# Altium PCB STM32F429_18Bit_20_09.PcbDoc (part 1 of 3)
Units mm, origin at the board's own origin, x right, y up, seen from the top; angles counter-clockwise.
Board outline 101.05 x 79.2 mm, 2 copper layers (Top Layer, Bottom Layer); 115 components, 171 nets, 599 pads, 391 vias.
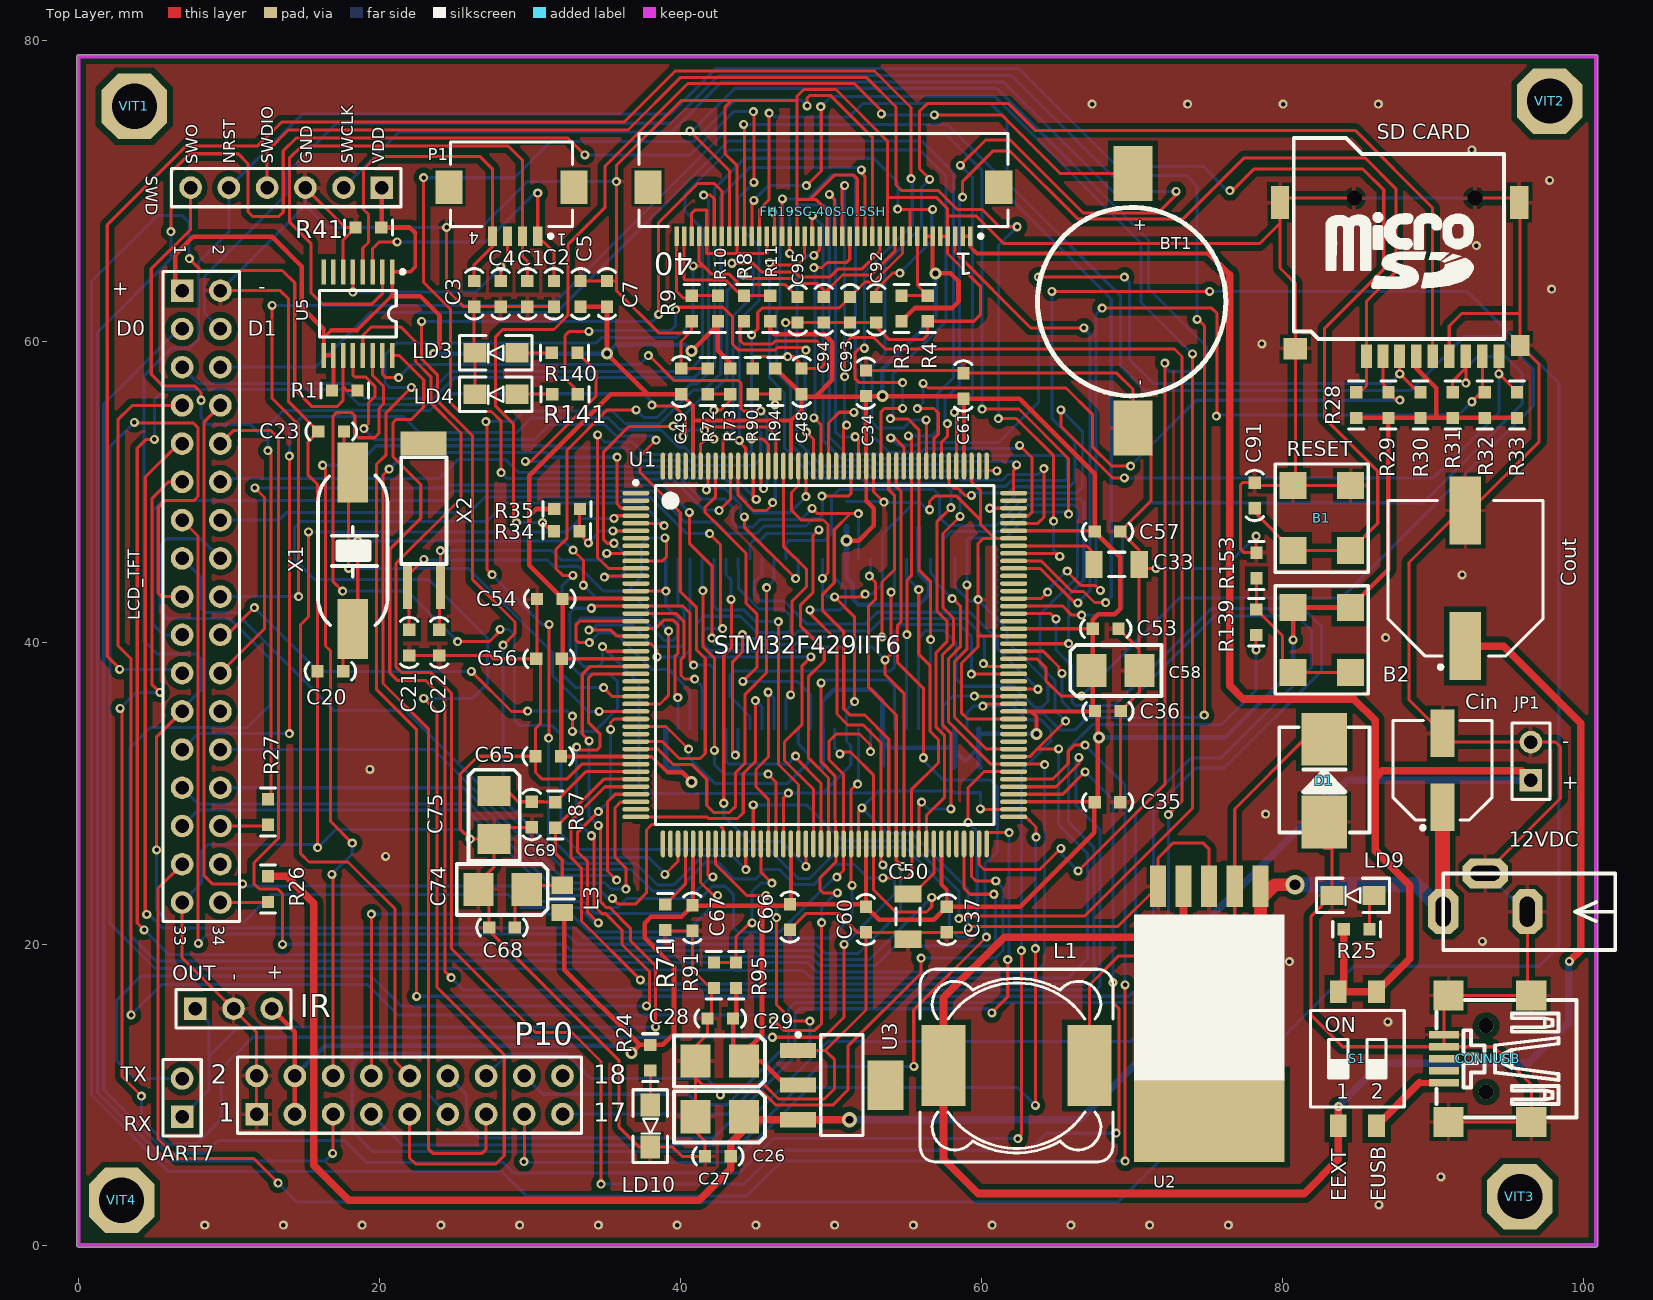
[diagram p0: Top Layer view]
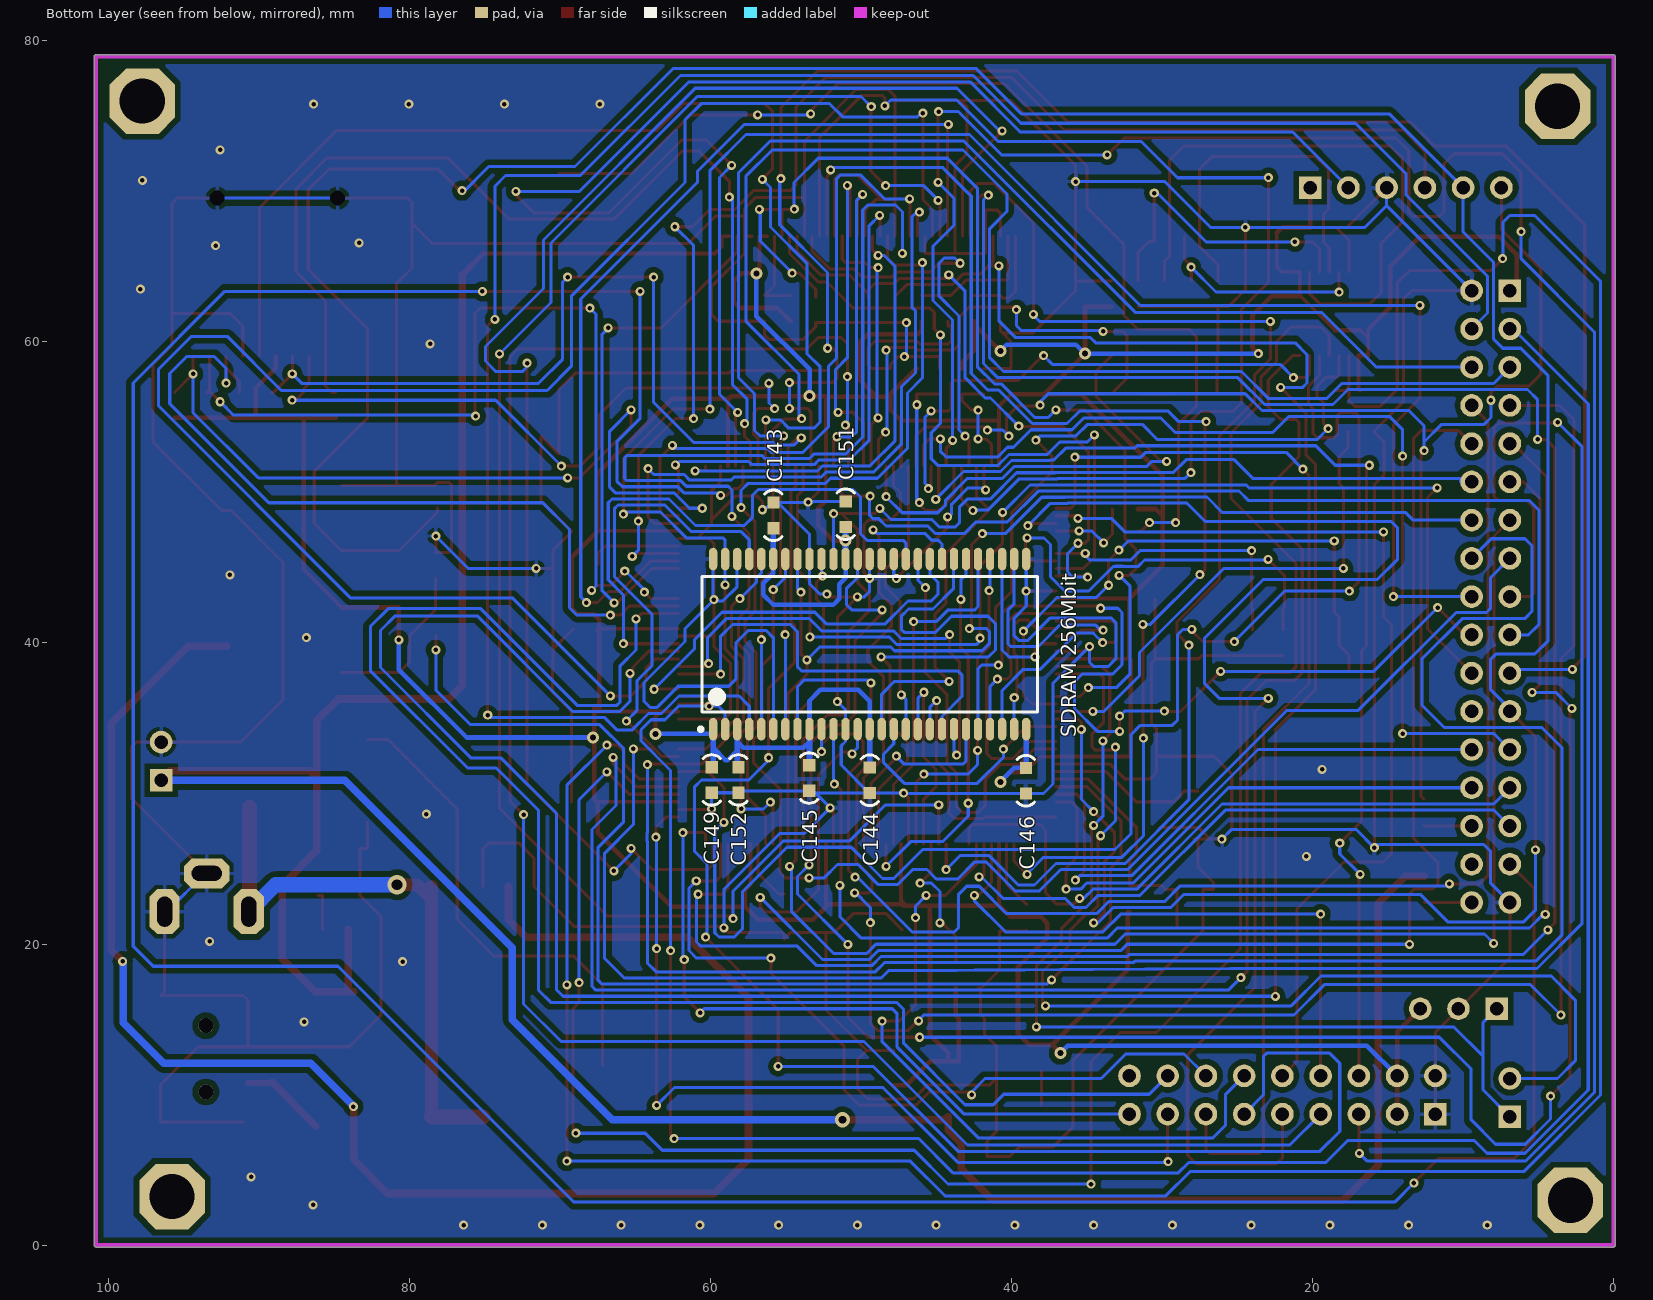
[diagram p1: Bottom Layer view, seen from below]

## Layer stack, top to bottom
Top Solder: solder mask 0.0102, Solder Resist, Dk 3.5
Top Layer: signal copper 0.0356
Dielectric1: dielectric 0.32, FR-4, Dk 4.8
Bottom Layer: signal copper 0.0356
Bottom Solder: solder mask 0.0102, Solder Resist, Dk 3.5

## Board outline
0,-0.127 cw(c0,0) -0.127,0 -0.127,78.95 cw(c0,78.95) 0,79.077 100.8,79.077 cw(c100.8,78.95) 100.927,78.95 100.927,0 cw(c100.8,0) 100.8,-0.127

## Design rules (kind name [scope] priority, off if disabled: settings)
Clearance Clearance_CAB [(InComponent('FH19SC-40S-0.5SH') OR InComponent('P1'))] p1: gap=0.2
Clearance Clearance_U [(InComponent('U1') OR InComponent('SDRAM 256Mbit'))] p2: gap=0.2
Clearance Clearance_Polygon [InPolygon] p3: gap=0.381
Clearance [All] p4: gap=0.203
Length [(InNetClass('Same Length'))] p1 off: maxlimit=40 minlimit=20
MatchedLengths [(InNetClass('Same Length'))] p1 off: tolerance=2.54 checknetsindiffpair=TRUE checkdiffpairvsdiffpair=TRUE checkothers=TRUE
MinimumSolderMaskSliver MinimumSolderMaskSliver_U16 [InComponent('U16')] p1 off: minsoldermaskwidth=0.254
MinimumSolderMaskSliver MinimumSolderMaskSliver_U7 [InComponent('U7')] p2 off: minsoldermaskwidth=0.254
MinimumSolderMaskSliver [All] p3 off: minsoldermaskwidth=0.254
PolygonConnect [All] p1: connectstyle=Relief reliefconductorwidth=0.254 reliefentries=4 polygonreliefangle="90 Angle" airgapwidth=0.254
RoutingPriority "RoutingPriority_Same Length" [(InNetClass('Same Length'))] p1: routingpriority=0
RoutingPriority [All] p2: routingpriority=1
RoutingVias RoutingVias_12V [InNet('+12VDC')] p1: holewidth=0.711 width=1.27 viastyle="Through Hole" minholewidth=0.711 minwidth=1.27 maxholewidth=0.711 maxwidth=1.27
RoutingVias RoutingVias_5V [InNet('+5V')] p2: holewidth=0.508 width=1.016 viastyle="Through Hole" minholewidth=0.508 minwidth=1.016 maxholewidth=2.54 maxwidth=7.62
RoutingVias RoutingVias_3V3 [InNet('+3V3')] p3: holewidth=0.4 width=0.8 viastyle="Through Hole" minholewidth=0.4 minwidth=0.8 maxholewidth=0.4 maxwidth=0.8
RoutingVias [All] p4: holewidth=0.3 width=0.6 viastyle="Through Hole" minholewidth=0.3 minwidth=0.6 maxholewidth=0.3 maxwidth=0.6
SMDNeckDown [All] p1: percent=80.000
SMDToCorner [All] p1: distance=0
SilkToSilkClearance [All] p1 off: silktosilkclearance=0.254
SilkToSolderMaskClearance SilkscreenOverComponentPads [IsPad] p1 off: minsilkscreentomaskgap=0.254 clearancetoexposedcopper=TRUE
SolderMaskExpansion [All] p1: expansion=0.102
UnConnectedPin [All] p1:
Width Width_12V [InNet('+12VDC')] p1: maxlimit=1.016 minlimit=1.016 preferedwidth=1.016
Width Width_5V [(InNet('E5V') OR InNet('5VUSB') OR InNet('+5V'))] p2: maxlimit=0.508 minlimit=0.508 preferedwidth=0.508
Width Width_3V3 [InNet('+3V3')] p3: maxlimit=0.305 minlimit=0.305 preferedwidth=0.305
Width Width_LCD_Module [(InNet('-7V') OR InNet('9V9') OR InNet('10V4') OR InNet('16V'))] p4: maxlimit=0.305 minlimit=0.305 preferedwidth=0.305
Width [All] p5: maxlimit=0.203 minlimit=0.203 preferedwidth=0.203
25 further rules are at their usual default settings.

## Classes and differential pairs
net class "Same Length": A0 A1 A2 A3 A4 A5 A6 A7 A8 A9 A10 A11 A12 D0 D1 D2 D3 D4 D5 D6 D7 D8 D9 D10 D11 D12 D13 D14 D15 PC0 PF11 PG4 PG5 PG8 PG15 PH3
net class LTDC_R[0..7]: LTDC_R2 LTDC_R3 LTDC_R4 LTDC_R5 LTDC_R6 LTDC_R7
net class "LCD Class": B0 B1 B2 B3 B4 B5 DCLK DE G0 G1 G2 G3 G4 G5 HS LTDC_R2 LTDC_R3 LTDC_R4 LTDC_R5 LTDC_R6 LTDC_R7 LTDC_VSYNC
net class G[0..7]: G0 G1 G2 G3 G4 G5
net class DCMI_D[0..7]: DCMI_D0 DCMI_D1 DCMI_D2 DCMI_D3 DCMI_D4 DCMI_D5 DCMI_D6 DCMI_D7
net class D[0..15]: D0 D1 D2 D3 D4 D5 D6 D7 D8 D9 D10 D11 D12 D13 D14 D15
net class "Camera Class": DCMI_D0 DCMI_D1 DCMI_D2 DCMI_D3 DCMI_D4 DCMI_D5 DCMI_D6 DCMI_D7 PA4 PA6 PB6 PB7 PG9
net class B[0..7]: B0 B1 B2 B3 B4 B5
net class A[0..12]: A0 A1 A2 A3 A4 A5 A6 A7 A8 A9 A10 A11 A12
component class U_SWD: R41 SWD
component class U_STM32Fx: B1 BT1 C20 C21 C22 C23 C33 C34 C35 C36 C37 C48 C49 C50 C53 C54 C56 C57 C58 C60 C61 C65 C66 C67 C68 C69 C74 C75 C91 L3 R34 R35 R71 R72 R73 R87 R90 R91 R94 R95 U1 X1 X2
component class U_Power: 12VDC C26 C27 C28 C29 Cin CONNUSB Cout D1 JP1 L1 LD9 LD10 R24 R25 S1 U2 U3
component class U_MicroSDCard: R28 R29 R30 R31 R32 R33 "SD CARD"
component class U_Memory: C143 C144 C145 C146 C149 C151 C152 "SDRAM 256Mbit"
component class U_LCD: LCD_TFT R26 R27
component class "U_LCD Module": C1 C2 C3 C4 C5 C7 C92 C93 C94 C95 FH19SC-40S-0.5SH P1 R1 R3 R4 R8 R9 R10 R11 U5
component class "U_IO Peripherals": B2 IR LD3 LD4 R139 R140 R141 R153 UART7 VIT1 VIT2 VIT3 VIT4
component class U_Camera: P10

## Components (designator, comment, footprint, x,y, rotation, side; value= is the part's Value field where it differs from the comment)
12VDC "DC-10B" "DC IN" 90.65,22.15 r90 top (schematic designator CN18)
B1 "TD-0341 [RESET/Black]" PB 82.581,48.294 r0 top
B2 "WKUP" PB 82.581,40.199 r0 top
BT1 "PIN" PCBComponent_1 69.95,62.575 r90 top
C1 "0.1uF" 0603_C 29.805,63.191 r270 top
C2 "0.1uF" 0603_C 31.57,63.191 r270 top
C3 "0.1uF" 0603_C 26.275,63.191 r270 top
C4 "0.1uF" 0603_C 28.04,63.191 r270 top
C5 "10uF" 0603_C 33.335,63.191 r90 top
C7 "0.1uF" 0603_C 35.101,63.191 r90 top
C20 "20pF" 0603_C 16.725,38.125 r180 top
C21 "10pF" 0603_C 21.959,40.026 r270 top
C22 "10pF" 0603_C 23.959,40.026 r270 top
C23 "20pF" 0603_C 16.775,54.05 r180 top
C26 "10uF/16V" AVX-CAPC3528_V 42.591,8.524 r180 top
C27 "0.1uF" 0603_C 42.466,5.899 r180 top
C28 "10uF/16V" AVX-CAPC3528_V 42.591,12.224 r180 top
C29 "0.1uF" 0603_C 42.625,15.05 r180 top
C33 "2.2uF" CAPC3216X100N 68.95,45.225 r0 top
C34 "100nF" 0603_C 52.3,57.25 r90 top
C35 "100nF" 0603_C 68.35,29.425 r0 top
C36 "100nF" 0603_C 68.375,35.475 r0 top
C37 "100nF" 0603_C 57.675,21.625 r270 top
C48 "100nF" 0603_C 48.025,57.375 r90 top
C49 "100nF" 0603_C 40.025,57.375 r90 top
C50 "2.2uF" CAPC3216X100N 55.1,21.825 r270 top
C53 "100nF" 0603_C 68.225,40.95 r0 top
C54 "100nF" 0603_C 31.3,42.925 r180 top
C56 "100nF" 0603_C 31.25,38.95 r180 top
C57 "100nF" 0603_C 68.35,47.4 r0 top
C58 "4.7uF" AVX-CAPC3528_V 68.875,38.175 r0 top
C60 "100nF" 0603_C 52.3,21.625 r270 top
C61 "100nF" 0603_C 58.775,57.075 r90 top
C65 "100nF" 0603_C 31.2,32.475 r180 top
C66 "100nF" 0603_C 47.25,21.8 r270 top
C67 "100nF" 0603_C 40.775,21.725 r270 top
C68 "100nF" 0603_C 28.125,21.1 r180 top
C69 "100nF" 0603_C 30.1,28.6 r270 top
C74 "1uF" AVX-CAPC3528_V 28.166,23.624 r180 top
C75 "1uF" AVX-CAPC3528_V 27.6,28.575 r270 top
C91 "100nF" 0603_C 78.125,49.8 r270 top
C92 "3.3pF" 0603_C 52.986,62.132 r270 top
C93 "3.3pF" 0603_C 51.244,62.132 r270 top
C94 "3.3pF" 0603_C 49.502,62.132 r270 top
C95 "3.3pF" 0603_C 47.761,62.132 r270 top
C143 "100nF" 0603_C 55.8,48.475 r90 bottom
C144 "100nF" 0603_C 49.4,30.875 r270 bottom
C145 "100nF" 0603_C 53.425,31.025 r270 bottom
C146 "100nF" 0603_C 39.025,30.85 r270 bottom
C149 "100nF" 0603_C 59.9,30.9 r270 bottom
C151 "100nF" 0603_C 51,48.55 r90 bottom
C152 "100nF" 0603_C 58.125,30.9 r270 bottom
Cin "100uF/16V" CAPAE660X540N 90.6,31.55 r90 top
CONNUSB "Mini USB B" "USB MINI B RECEPTACLE" 93.6,12.375 r270 top
Cout "1000uF/16V" CAPAE1030X1020N 92.125,44.3 r90 top
D1 "MBRS340T3" DO-214AB 82.75,30.85 r90 top
FH19SC-40S-0.5SH "FH19SC-40S-0.5SH" FFC/SM0.5-2H40A 49.475,68.65 r180 top locked
IR "IR" HDR1X3 7.75,15.7 r0 top
JP1 "Nguon Ngoai" HDR1X2#1 96.475,30.875 r90 top
L1 "100uH" IND_BOURNS_PM127SH 62.3,11.925 r180 top
L3 "BEAD" INDC2012X105N 32.125,23 r270 top
LCD_TFT "Header 17X2" HDR2X17 6.875,63.4 r270 top locked
LD3 "Red" 0805_LED 29.109,56.526 r180 top
LD4 "Blue" 0805_LED 29.109,59.276 r180 top
LD9 "red" 0805_LED 86.05,23.225 r180 top
LD10 "Blue" 0805_LED 37.975,9.3 r270 top
P1 "CAB 4" FFC/SM1.0-2H4 28.75,68.65 r180 top
P10 "Header 9X2" HDR2X9 11.825,8.7 r0 top locked
R1 "10K" 0603_R 17.675,56.775 r0 top
R3 "0R, not fit" 0603_R 54.659,62.223 r270 top
R4 "10K" 0603_R 56.401,62.223 r90 top
R8 "10K/not fit" 0603_R 44.209,62.223 r270 top
R9 "10K" 0603_R 40.726,62.223 r270 top
R10 "10K/Not fit" 0603_R 42.467,62.223 r90 top
R11 "10K" 0603_R 45.951,62.223 r90 top
R24 "470" 0603_R 37.975,12.45 r90 top
R25 "1K" 0603_R 84.9,20.975 r180 top
R26 "0 not fit" 0603_R 12.575,23.65 r270 top
R27 "0 not fit" 0603_R 12.575,28.775 r270 top
R28 "47K" 0603_R 84.875,55.8 r90 top
R29 "47K" 0603_R 87.01,55.8 r90 top
R30 "47K" 0603_R 89.145,55.8 r90 top
R31 "47K" 0603_R 91.28,55.8 r90 top
R32 "47K" 0603_R 93.415,55.8 r90 top
R33 "47K" 0603_R 95.55,55.8 r270 top
R34 "0R" 0603_R 32.425,47.425 r0 top
R35 "0R not fit" 0603_R 32.45,48.9 r0 top
R41 "R0.4W" 0603_R 19.25,67.6 r0 top
R71 "10K" 0603_R 38.975,21.775 r270 top
R72 "0 ohm not fit" 0603_R 41.8,57.375 r90 top
R73 "0" 0603_R 43.284,57.375 r90 top
R87 "0" 0603_R 31.666,28.574 r270 top
R90 "510" 0603_R 44.775,57.375 r90 top
R91 "510 not fit" 0603_R 42.2,17.925 r270 top
R94 "10K not fit" 0603_R 46.275,57.375 r270 top
R95 "10K" 0603_R 43.675,17.925 r90 top
R139 "330" 0603_R 78.225,41.375 r270 top
R140 "680" 0603_R 32.284,59.276 r0 top
R141 "680" 0603_R 32.309,56.526 r0 top
R153 "220K" 0603_R 78.25,45.15 r90 top
S1 "SW DIP-2" SW_OMRON_A6S-2102-H 84.95,12.375 r90 top
"SD CARD" "SD_Card_TF" SD_Card_TF 85.55,59.05 r0 top
"SDRAM 256Mbit" "MT48LC16M16A2P-75 IT" TSOP2-54_N 49.404,39.925 r90 bottom locked
SWD "Header 6H" HDR1X6 20.141,70.249 r180 top
U1 "MC-ARM-STM32F4X9-SQ176" STM-LQFP176_N 49.566,39.199 r0 top locked
U2 "LM2576T-5.0" TO263-5 75.1,23.8 r180 top
U3 "LM1117-3.3V" SOT223-4N 50.7,10.625 r0 top
U5 "TSC2046IPW" PW016 18.55,61.875 r180 top
UART7 "Header 2" HDR1X2#2 6.875,8.525 r90 top locked
VIT1 "1" VIT 3.7,75.65 r0 top
VIT2 "1" VIT 97.725,76 r0 top
VIT3 "1" VIT 95.75,3.225 r0 top
VIT4 "1" VIT 2.85,2.975 r0 top
X1 "25MHz(with socket)" HC49/US-SMD 18.209,46.126 r270 top
X2 "32.768KHz" "Cylindrical crystal" 22.934,48.501 r90 top

## Footprints (in the part's own frame and the unit in brackets; to place one, negate y for a bottom-side part, rotate by r counter-clockwise, add the part's x,y. Pads: shape width x height; smd on the part's side, far side on the other; paste and mask are expansions set on the pad)
0603_C [mil]
  rect 32x32 smd paste+0: 1(-33.46,0) 2(33.46,0)
  silkscreen extent -66,-23 66,23
0603_R [mil]
  rect 32x32 smd paste+0: 1(-33.47,0) 2(33.46,0)
  silkscreen extent -63,-20 63,20
0805_LED [mil]
  rect 60x50 smd paste+0: 1(0,0) 2(109.9,0)
  silkscreen extent -40,-45 150,45
AVX-CAPC3528_V [mm] "SMT Capacitor, 2 Leads, Body 3.5x2.8mm"
  rect 2x2.2 smd paste+0: 1(-1.6,0) 2(1.6,0)
  silkscreen extent -3,-1.7 3.05,1.7, body extent -1.79,-1.54 1.8,1.54, height 1.9
CAPAE660X540N [mm] "Capacitor, Aluminium Electrolytric, 6.6mm L X 6.6mm W X 5.4mm H, IPC Medium Density"
  rect 3.15x1.6 smd paste+0: 1(-2.45,0) 2(2.45,0)
  silkscreen extent -3.95,-3.3 3.3,3.3, body extent -3.9,-3.4 3.9,3.4, height 5.7
CAPAE1030X1020N [mm] "Capacitor, Aluminium Electrolytric, 10.3mm L X 10.3mm W X 10.2mm H, IPC Medium Density"
  rect 4.5x2.1 smd paste+0: 1(-4.5,0) 2(4.5,0)
  silkscreen extent -6.02,-5.15 5.15,5.15, body extent -6,-5.25 6,5.25, height 10.2
CAPC3216X100N [mm] "Chip Capacitor, Body 3.2x1.6mm, IPC Medium Density"
  rect 1.15x1.8 smd paste+0: 1(-1.5,0) 2(1.5,0)
  silkscreen extent -0.55,-0.8 0.55,0.8, body extent -1.7,-0.9 1.7,0.9, height 0.94
"Cylindrical crystal" [mil]
  rect 118.1x23.6 smd paste+0: 1(-187.37,-43.27) 2(-187.37,43.28)
  rect 62x120 smd paste+0: 3(187.37,1.14)
  silkscreen extent -128,-59 151,59, body extent -191,-55 183,55, height 87
"DC IN" [mm] "Power Header 3mm"
  oct 3x2 hole 1 slot 2 at 0 deg paste+1: 1(0,0) 3(0,-5.588)
  oct 2x3 hole 1 slot 2 at 90 deg paste+1: 2(2.54,-2.794)
  silkscreen extent -2.54,-11.43 2.54,0
DO-214AB [mm] "SMC"
  rect 3.499x3 smd paste+0: 1(-2.747,0) 2(2.747,0)
  silkscreen extent -3.45,-3 3.55,3, body extent -3.92,-3 4.03,2.9, height 2.3
FFC/SM0.5-2H40A [mm] "Connector; FH12 Series; 40 Position; 0.5mm Spaced Top Contact"
  rect 0.3x1.3 smd: 1(-9.75,1.625) 2(-9.25,1.625) 3(-8.75,1.625) 4(-8.25,1.625) 5(-7.75,1.625) 6(-7.25,1.625) 7(-6.75,1.625) 8(-6.25,1.625) 9(-5.75,1.625) 10(-5.25,1.625) 11(-4.75,1.625) 12(-4.25,1.625) 13(-3.75,1.625) 14(-3.25,1.625) 15(-2.75,1.625) 16(-2.25,1.625) 17(-1.75,1.625) 18(-1.25,1.625) 19(-0.75,1.625) 20(-0.25,1.625) 21(0.25,1.625) 22(0.75,1.625) 23(1.25,1.625) 24(1.75,1.625) 25(2.25,1.625) 26(2.75,1.625) 27(3.25,1.625) 28(3.75,1.625) 29(4.25,1.625) 30(4.75,1.625) 31(5.25,1.625) 32(5.75,1.625) 33(6.25,1.625) 34(6.75,1.625) 35(7.25,1.625) 36(7.75,1.625) 37(8.25,1.625) 38(8.75,1.625) 39(9.25,1.625) 40(9.75,1.625)
  rect 1.8x2.2 smd: 41(-11.65,-1.625) 42(11.65,-1.625)
  silkscreen extent -12.25,-5.2 12.25,1.75
FFC/SM1.0-2H4 [mm] "Connector; FH12 Series; 4 Position; 1.0mm Spaced Bottom Eccentric Contact"
  rect 0.6x1.3 smd paste+0: 1(-1.75,1.625) 2(-0.75,1.625) 3(0.25,1.625) 4(1.25,1.625)
  rect 1.8x2.2 smd paste+0: 5(4.15,-1.625) 6(-4.15,-1.625)
  silkscreen extent -4.05,-4.62 4.05,1.75
HC49/US-SMD [mm] "HC-49/U SMD Low Profile XTAL"
  rect 4x2 smd paste+0: 1(-5.195,0) 2(5.195,0)
  silkscreen extent -4.99,-2.3 4.95,2.3, body extent -6.2,-2.3 6.1,2.2, height 5.18
HDR1X2#1 [mm] "Connector; Header; 2 Position"
  rect 1.5x1.5 hole 0.9 paste+0: 1(0,0)
  round 1.5 hole 0.9 paste+0: 2(2.54,0)
  silkscreen extent -1.27,-1.27 3.81,1.27
HDR1X2#2 [mm] "Connector; Header; 2 Position"
  rect 1.5x1.5 hole 0.9: 1(0,0)
  round 1.5 hole 0.9: 2(2.54,0)
  silkscreen extent -1.27,-1.27 3.81,1.27
HDR1X3 [mm] "Connector; Header; 3 Position"
  rect 1.5x1.5 hole 0.9: 1(0,0)
  round 1.5 hole 0.9: 2(2.54,0) 3(5.08,0)
  silkscreen extent -1.27,-1.27 6.35,1.27
HDR1X6 [mm] "Connector; Header; 6 Position"
  rect 1.5x1.5 hole 0.9 paste+0: 1(0,0)
  round 1.5 hole 0.9 paste+0: 2(2.54,0) 3(5.08,0) 4(7.62,0) 5(10.16,0) 6(12.7,0)
  silkscreen extent -1.27,-1.27 13.97,1.27, body extent -1.27,-1.27 13.97,1.27, height 7
HDR2X9 [mm] "Connector; Header; 9x2 Position"
  rect 1.5x1.5 hole 0.9: 1(0,0)
  round 1.5 hole 0.9: 2(0,2.54) 3(2.54,0) 4(2.54,2.54) 5(5.08,0) 6(5.08,2.54) 7(7.62,0) 8(7.62,2.54) 9(10.16,0) 10(10.16,2.54) 11(12.7,0) 12(12.7,2.54) 13(15.24,0) 14(15.24,2.54) 15(17.78,0) 16(17.78,2.54) 17(20.32,0) 18(20.32,2.54)
  silkscreen extent -1.27,-1.27 21.59,3.81
HDR2X17 [mm] "Connector; Header; 17x2 Position"
  rect 1.5x1.5 hole 0.9 paste+0: 1(0,0)
  round 1.5 hole 0.9 paste+0: 2(0,2.54) 3(2.54,0) 4(2.54,2.54) 5(5.08,0) 6(5.08,2.54) 7(7.62,0) 8(7.62,2.54) 9(10.16,0) 10(10.16,2.54) 11(12.7,0) 12(12.7,2.54) 13(15.24,0) 14(15.24,2.54) 15(17.78,0) 16(17.78,2.54) 17(20.32,0) 18(20.32,2.54) 19(22.86,0) 20(22.86,2.54) 21(25.4,0) 22(25.4,2.54) 23(27.94,0) 24(27.94,2.54) 25(30.48,0) 26(30.48,2.54) 27(33.02,0) 28(33.02,2.54) 29(35.56,0) 30(35.56,2.54) 31(38.1,0) 32(38.1,2.54) 33(40.64,0) 34(40.64,2.54)
  silkscreen extent -1.27,-1.27 41.91,3.81
IND_BOURNS_PM127SH [mm] "SMD Inductor  Body Width 12.5mm Body Lenght 12.5mm Height 8mm"
  rect 2.9x5.4 smd paste+0: 1(-4.85,0) 2(4.85,0)
  silkscreen extent -6.4,-6.4 6.4,6.4, body extent -6.4,-6.4 6.4,6.4, height 8
INDC2012X105N [mm] "Chip Inductor, EIA 0805, Metric 2012, Body 2.0x1.25mm, IPC Medium Density"
  rect 1.15x1.45 smd paste+0: 1(-0.9,0) 2(0.9,0)
  silkscreen extent 0,-0.8 0,0.8, body extent -1.1,-0.7 1.1,0.7, height 1.1
PB [mil]
  rect 70x70 smd paste+0: 1(-75,85) 2(-75,-85) 3(75,-85) 4(75,85)
  silkscreen extent -122,-141 122,142
PCBComponent_1 [mil]
  rect 144x102 smd paste+0: 1(338.58,-3.94) 2(-326.77,-3.94)
  Top Overlay keep-out circle w10: c3.94,0 r247.91
  silkscreen extent -244,-248 252,248
PW016 [mm] "Shrink Small Outline; 16 Leads; Body Width 4.4 mm; Pitch 0.65 mm"
  rect 0.3x1.65 smd paste+0: 1(-2.275,-2.775) 2(-1.625,-2.775) 3(-0.975,-2.775) 4(-0.325,-2.775) 5(0.325,-2.775) 6(0.975,-2.775) 7(1.625,-2.775) 8(2.275,-2.775) 9(2.275,2.775) 10(1.625,2.775) 11(0.975,2.775) 12(0.325,2.775) 13(-0.325,2.775) 14(-0.975,2.775) 15(-1.625,2.775) 16(-2.275,2.775)
  silkscreen extent -3.1,-2.9 2.55,1.55
SD_Card_TF [mil]
  rect 28x62 smd paste+0: 1(0,0) 2(43.31,0) 3(86.61,0) 4(129.92,0) 5(173.23,0) 6(216.54,0) 7(259.84,0) 8(303.15,0) 9(346.46,0)
  rect 48x86 smd paste+0: 6(-226,402) 6(400,402)
  rect 62x56 smd paste+0: 6(-186,20)
  round 30 hole 39.37 paste+0 mask+0: 6(-31.5,413.39) 6(283.47,413.39)
  rect 48x56 smd paste+0: 6(402,28)
  silkscreen extent -190,45 360,571, body extent -235,-27 407,572, height 79
SOT223-4N [mm] "SOT223, 4-Leads, Body 6.5x3.5mm, Pitch 2.3mm, Lead Span 7mm, IPC Medium Density"
  rect 2.4x1 smd paste+0: 1(-2.9,2.3) 2(-2.9,0) 3(-2.9,-2.3)
  rect 2.4x3.3 smd paste+0: 4(2.9,0)
  silkscreen extent -3.02,-3.35 1.4,3.47, body extent -3.39,-3.27 3.5,3.23, height 1.72
STM-LQFP176_N [mm] "Thin QFP, 176-Leads, Body 24x24mm, Pitch 0.5mm, IPC Medium Density"
  oval 1.8x0.3 smd paste+0: 1(-12.55,10.75) 2(-12.55,10.25) 3(-12.55,9.75) 4(-12.55,9.25) 5(-12.55,8.75) 6(-12.55,8.25) 7(-12.55,7.75) 8(-12.55,7.25) 9(-12.55,6.75) 10(-12.55,6.25) 11(-12.55,5.75) 12(-12.55,5.25) 13(-12.55,4.75) 14(-12.55,4.25) 15(-12.55,3.75) 16(-12.55,3.25) 17(-12.55,2.75) 18(-12.55,2.25) 19(-12.55,1.75) 20(-12.55,1.25) 21(-12.55,0.75) 22(-12.55,0.25) 23(-12.55,-0.25) 24(-12.55,-0.75) 25(-12.55,-1.25) 26(-12.55,-1.75) 27(-12.55,-2.25) 28(-12.55,-2.75) 29(-12.55,-3.25) 30(-12.55,-3.75) 31(-12.55,-4.25) 32(-12.55,-4.75) 33(-12.55,-5.25) 34(-12.55,-5.75) 35(-12.55,-6.25) 36(-12.55,-6.75) 37(-12.55,-7.25) 38(-12.55,-7.75) 39(-12.55,-8.25) 40(-12.55,-8.75) 41(-12.55,-9.25) 42(-12.55,-9.75) 43(-12.55,-10.25) 44(-12.55,-10.75) 89(12.55,-10.75) 90(12.55,-10.25) 91(12.55,-9.75) 92(12.55,-9.25) 93(12.55,-8.75) 94(12.55,-8.25) 95(12.55,-7.75) 96(12.55,-7.25) 97(12.55,-6.75) 98(12.55,-6.25) 99(12.55,-5.75) 100(12.55,-5.25) 101(12.55,-4.75) 102(12.55,-4.25) 103(12.55,-3.75) 104(12.55,-3.25) 105(12.55,-2.75) 106(12.55,-2.25) 107(12.55,-1.75) 108(12.55,-1.25) 109(12.55,-0.75) 110(12.55,-0.25) 111(12.55,0.25) 112(12.55,0.75) 113(12.55,1.25) 114(12.55,1.75) 115(12.55,2.25) 116(12.55,2.75) 117(12.55,3.25) 118(12.55,3.75) 119(12.55,4.25) 120(12.55,4.75) 121(12.55,5.25) 122(12.55,5.75) 123(12.55,6.25) 124(12.55,6.75) 125(12.55,7.25) 126(12.55,7.75) 127(12.55,8.25) 128(12.55,8.75) 129(12.55,9.25) 130(12.55,9.75) 131(12.55,10.25) 132(12.55,10.75)
  oval 0.3x1.8 smd paste+0: 45(-10.75,-12.55) 46(-10.25,-12.55) 47(-9.75,-12.55) 48(-9.25,-12.55) 49(-8.75,-12.55) 50(-8.25,-12.55) 51(-7.75,-12.55) 52(-7.25,-12.55) 53(-6.75,-12.55) 54(-6.25,-12.55) 55(-5.75,-12.55) 56(-5.25,-12.55) 57(-4.75,-12.55) 58(-4.25,-12.55) 59(-3.75,-12.55) 60(-3.25,-12.55) 61(-2.75,-12.55) 62(-2.25,-12.55) 63(-1.75,-12.55) 64(-1.25,-12.55) 65(-0.75,-12.55) 66(-0.25,-12.55) 67(0.25,-12.55) 68(0.75,-12.55) 69(1.25,-12.55) 70(1.75,-12.55) 71(2.25,-12.55) 72(2.75,-12.55) 73(3.25,-12.55) 74(3.75,-12.55) 75(4.25,-12.55) 76(4.75,-12.55) 77(5.25,-12.55) 78(5.75,-12.55) 79(6.25,-12.55) 80(6.75,-12.55) 81(7.25,-12.55) 82(7.75,-12.55) 83(8.25,-12.55) 84(8.75,-12.55) 85(9.25,-12.55) 86(9.75,-12.55) 87(10.25,-12.55) 88(10.75,-12.55) 133(10.75,12.55) 134(10.25,12.55) 135(9.75,12.55) 136(9.25,12.55) 137(8.75,12.55) 138(8.25,12.55) 139(7.75,12.55) 140(7.25,12.55) 141(6.75,12.55) 142(6.25,12.55) 143(5.75,12.55) 144(5.25,12.55) 145(4.75,12.55) 146(4.25,12.55) 147(3.75,12.55) 148(3.25,12.55) 149(2.75,12.55) 150(2.25,12.55) 151(1.75,12.55) 152(1.25,12.55) 153(0.75,12.55) 154(0.25,12.55) 155(-0.25,12.55) 156(-0.75,12.55) 157(-1.25,12.55) 158(-1.75,12.55) 159(-2.25,12.55) 160(-2.75,12.55) 161(-3.25,12.55) 162(-3.75,12.55) 163(-4.25,12.55) 164(-4.75,12.55) 165(-5.25,12.55) 166(-5.75,12.55) 167(-6.25,12.55) 168(-6.75,12.55) 169(-7.25,12.55) 170(-7.75,12.55) 171(-8.25,12.55) 172(-8.75,12.55) 173(-9.25,12.55) 174(-9.75,12.55) 175(-10.25,12.55) 176(-10.75,12.55)
  silkscreen extent -12.67,-11.25 11.25,11.57, body extent -12,-12 12,12, height 1.6
SW_OMRON_A6S-2102-H [mm] "Pitch 2.54mm, Body 6.2x6.4mm, 2 Ways SPST Surface-Mounting DIP Switch, OMRON A6S-H"
  rect 1.5x1.1 smd paste+0: 1(-4.45,1.27) 2(-4.45,-1.27) 3(4.45,-1.27) 4(4.45,1.27)
  silkscreen extent -3.2,-3.11 3.2,3.11, body extent -4.9,-3.01 4.9,3.01, height 3.97
TO263-5 [mm] "LM2576-SMD"
  rect 1.07x2.75 smd paste+0: 1(-3.4,-0.025) 2(-1.7,-0.025) 3(0,-0.025) 4(1.7,-0.025) 5(3.4,-0.025)
  rect 10x6 smd paste+0: 1(0,15.289)
  silkscreen extent -5,1.85 5,12.88, body extent -5,-0.38 5,15.29, height 4.79
TSOP2-54_N [mm] "SOP, 54-Leads, Body 22.2x10.16mm, Pitch 0.8mm, IPC Medium Density"
  oval 1.5x0.55 smd paste+0: 1(-5.65,10.4) 2(-5.65,9.6) 3(-5.65,8.8) 4(-5.65,8) 5(-5.65,7.2) 6(-5.65,6.4) 7(-5.65,5.6) 8(-5.65,4.8) 9(-5.65,4) 10(-5.65,3.2) 11(-5.65,2.4) 12(-5.65,1.6) 13(-5.65,0.8) 14(-5.65,0) 15(-5.65,-0.8) 16(-5.65,-1.6) 17(-5.65,-2.4) 18(-5.65,-3.2) 19(-5.65,-4) 20(-5.65,-4.8) 21(-5.65,-5.6) 22(-5.65,-6.4) 23(-5.65,-7.2) 24(-5.65,-8) 25(-5.65,-8.8) 26(-5.65,-9.6) 27(-5.65,-10.4) 28(5.65,-10.4) 29(5.65,-9.6) 30(5.65,-8.8) 31(5.65,-8) 32(5.65,-7.2) 33(5.65,-6.4) 34(5.65,-5.6) 35(5.65,-4.8) 36(5.65,-4) 37(5.65,-3.2) 38(5.65,-2.4) 39(5.65,-1.6) 40(5.65,-0.8) 41(5.65,0) 42(5.65,0.8) 43(5.65,1.6) 44(5.65,2.4) 45(5.65,3.2) 46(5.65,4) 47(5.65,4.8) 48(5.65,5.6) 49(5.65,6.4) 50(5.65,7.2) 51(5.65,8) 52(5.65,8.8) 53(5.65,9.6) 54(5.65,10.4)
  silkscreen extent -5.77,-11.15 4.5,11.35, body extent -5.12,-11.15 5.12,11.15, height 1.2
"USB MINI B RECEPTACLE" [mm]
  rect 0.5x2 smd paste+0: 1(1.6,-2.901) 2(0.8,-2.901) 3(0,-2.901) 4(-0.8,-2.901) 5(-1.6,-2.901)
  rect 2x2 smd paste+0: SHIELD(-4.2,2.9) SHIELD(-4.2,-2.6) SHIELD(4.201,2.9) SHIELD(4.201,-2.6)
  round 1 / inner round 1.524 / far side round 1 hole 1 unplated paste+0: ""(-2.2,-0.1) ""(2.2,-0.1)
  silkscreen extent -3.9,-3.4 3.9,5.9, body extent -5.3,-3.3 5.4,5.9, height 3.95
VIT [mm] "VIT"
  oct 4.35x4.35 hole 3 paste+0 mask-1.5: VIT1(0,0)

## Part data
12VDC: library part PJ202A
B1 B2: library part "SW PUSHBUTTON", "SE PUSHBUTTON"
BT1: library part Battery3.3V, "Multicell Battery"
C1 C2 C3 C4 C5 C7 C92 C93 C94 C95: library part GRM188R71A225KE15, "Murata General Purpose Ceramic Cap 0603 2.2uF 10V 10% X7R"
C20 C21 C22 C23 C91: library part CAP, "Capacitor"
C26 C28 Cin Cout: library part AVX-CAP-P-2
C27 C29 C33 C34 C35 C36 C37 C48 C49 C50 C53 C54 C56 C57 C60 C61 C65 C66 C67 C68 C69 C143 C144 C145 C146 C149 C151 C152: library part Cap, "Capacitor"
C58 C74 C75: library part "Cap Pol1", "Polarized Capacitor (Radial)"
CONNUSB: library part 10033526-N3212LF, "FCI Mini USB B Recptacle Right Angle"
D1: library part D1A, "Diode 1A"
IR: library part "Header 3", "Header, 3-Pin"
JP1: library part "Header 2", "Header, 2-Pin"
L1: library part L1, "Inductor"
L3: library part Inductor, "Inductor"
LCD_TFT: "Header, 17-Pin, Dual row"
LD3 LD4 LD9 LD10: library part LED2, "Typical RED, GREEN, YELLOW, AMBER GaAs LED"
P1: library part "Header 4", "Header, 4-Pin"
P10: "Header, 9-Pin, Dual row"
R1 R3 R4 R8 R9 R10 R11: library part RC0603JR-0710RL, "Yageo RES 10R 5% 1/10W 0603"
R24 R25 R34 R35 R90 R91 R94 R95 R153: library part res1, "Resistor"
R26 R27 R28 R29 R30 R31 R32 R33 R71 R72 R73 R87 R139 R140 R141: library part Res1, "Resistor"
R41: library part "Res 1/4 W", "Resistor"
S1: "DIP Switch, 2 Position, SPST"
"SD CARD": "SD"
"SDRAM 256Mbit": "256Mb Synchronous High-Speed CMOS DRAM, 16Mb x 16Bit x 4 Banks, 54-Pin TSOP Pb-free, Industrial"
SWD: "Header, 6-Pin, Right Angle"
U2: "SIMPLE SWITCHER; 3A Step-Down Voltage Regulator"
U3: library part LM1117, "800mA Low-Dropout Linear Regulator"
U5: "4-Wire Touch Screen controller with Low-Voltage I/O Interface, 16-Pin TSSOP, Pb-Free"
UART7: "Header, 2-Pin"
VIT1 VIT2 VIT3 VIT4: library part VIT, "Oc Vit"
X1: library part CRYSTAL, "Crystal"
X2: library part XTAL/32KHz, "Crystal Oscillator"

## Via types
v1: diameter 0.6, hole 0.3, Top Layer to Bottom Layer, 380 vias
v2: diameter 0.8, hole 0.4, Top Layer to Bottom Layer, 9 vias
v3: diameter 1.016, hole 0.508, Top Layer to Bottom Layer, 1 vias
v4: diameter 1.27, hole 0.711, Top Layer to Bottom Layer, 1 vias

## Nets (pads, with @x,y where several pads share a name; then routed paths per layer and width w, separated by ;. In a path a pad name is that pad's centre, name@x,y a point inside that pad or via, vN(x,y) a via of type N, cw(c..) or ccw(c..) an arc to the next point about the centre after c; other vN are vias at no path point)
5VUSB: CONNUSB.1 S1.2 | length 5.7
  Top Layer w0.4: 89.07,10.775 CONNUSB.1@90.699,10.775
  Top Layer w0.508: S1.2@86.22,7.925 89.07,10.775
+3V3: "SD CARD.4" "SDRAM 256Mbit.1" "SDRAM 256Mbit.3" "SDRAM 256Mbit.9" "SDRAM 256Mbit.14" "SDRAM 256Mbit.27" "SDRAM 256Mbit.43" "SDRAM 256Mbit.49" B2.1 B2.4 C5.1 C7.1 C28.1 C29.1 C34.1 C35.1 C36.1 C37.1 C48.1 C49.1 C53.1 C54.1 C56.1 C57.1 C58.1 C60.1 C61.1 C65.1 C66.1 C67.1 C143.1 C144.1 C145.1 C146.1 C149.1 C151.1 C152.1 FH19SC-40S-0.5SH.6 FH19SC-40S-0.5SH.7 IR.3 L3.2 LCD_TFT.1 P10.3 P10.4 R1.1 R3.2 R10.1 R11.1 R24.2 R28.1 R29.1 R30.1 R31.1 R32.1 R33.2 R35.1 R41.2 R73.2 R94.1 R95.1 SWD.1 U1.15 U1.23 U1.36 U1.49 U1.62 U1.72 U1.82 U1.91 U1.103 U1.114 U1.127 U1.136 U1.149 U1.159 U1.172 U3.2 U5.1 U5.9 U5.10 | length 509
  Top Layer w0.24: U5.9@16.275,59.1 16.275,60.264 ; 16.275,60.833 16.275,60.264 ; 16.777,60.765 16.275,60.264 ; 18.49,60.765 20.765,63.04 ; 20.825,63.108 U5.1@20.825,64.65 22.025,64.65 22.35,64.975 22.35,67.25 ; U1.36@37.016,32.449 38.079,32.449 39.129,31.4 ; 52.316,49.459 U1.149@52.316,51.749 ; FH19SC-40S-0.5SH.7@56.225,67.025 56.225,67.02 FH19SC-40S-0.5SH.6@56.725,67.02 ; v2@56.725,64.757 FH19SC-40S-0.5SH.6@56.725,67.02 ; FH19SC-40S-0.5SH.6@56.725,67.025 FH19SC-40S-0.5SH.6@56.725,67.02 ; U1.103@62.116,35.449 63.276,35.449 63.632,35.094 v2(63.632,33.965)
  Top Layer w0.254: R1.1@16.825,56.775 16.925,56.875 U5.10@16.925,59.1 ; C65.1@32.05,32.475 32.076,32.449 U1.36@37.016,32.449 ; C56.1@32.15,38.949 U1.23@37.016,38.949 ; C54.1@32.15,42.925 32.174,42.949 U1.15@37.016,42.949 ; C49.1@40.025,56.525 40.816,55.734 40.816,54.8 ; C67.1@40.816,22.616 U1.49@40.816,26.649 ; U1.172@40.816,51.749 40.816,54.8 ; C66.1@46.991,22.575 47.316,22.9 U1.62@47.316,26.649 ; U1.159@47.316,51.749 47.316,54.775 ; C48.1@48.2,56.35 C48.1@48.025,56.525 48.025,55.484 47.316,54.775 ; C60.1@52.125,22.65 C60.1@52.3,22.475 52.316,22.49 U1.72@52.316,26.649 ; C34.1@52.3,56.35 52.3,51.765 U1.149@52.316,51.749 ; U1.82@57.316,26.649 57.316,23.959 57.675,23.6 C37.1@57.675,22.475 ; C61.1@58.775,56.225 58.816,56.184 U1.136@58.816,51.749 ; U1.91@62.116,29.449 C35.1@67.476,29.449 ; U1.103@62.116,35.449 67.499,35.449 C36.1@67.7,35.65 ; U1.114@62.116,40.949 C53.1@67.375,40.95 ; U1.127@62.116,47.449 67.451,47.449 C57.1@67.5,47.4 ; C53.1@67.375,40.95 C53.1@67.5,40.825 ; 40.816,54.8 40.841,54.775 47.316,54.775
  Top Layer w0.305: LCD_TFT.1@6.875,63.4 6.425,63.4 6.425,65.8 7.6,66.975 12.85,66.975 14.813,65.012 14.813,62.296 16.275,60.833 ; IR.3@12.83,15.7 14.365,14.165 P10.4@14.365,11.24 P10.3@14.365,8.7 ; U5.9@16.275,59.1 U5.10@16.925,59.1 ; 16.777,60.765 18.49,60.765 ; SWD.1@20.141,70.249 20.141,67.641 R41.2@20.1,67.6 22,67.6 22.35,67.25 ; 20.765,63.04 22.71,63.04 23.975,61.775 23.975,59.621 v1(23.576,59.222) ; 29.999,48.501 30.397,48.9 R35.1@31.6,48.9 ; C65.1@32.05,32.475 32.05,38.849 32.15,38.949 C54.1@32.15,42.925 29.925,45.15 29.925,51.1 35.35,56.525 C49.1@40.025,56.525 37.798,56.525 v2(35.1,59.222) C7.1@35.1,62.341 34.193,62.341 ; L3.2@32.125,22.1 32.263,22.1 32.263,18.303 37.266,13.299 37.28,13.299 ; C5.1@33.335,62.341 34.193,62.341 ; v2(36.733,12.752) 37.28,13.299 ; 39.129,31.4 40.1,31.4 v2(40.725,30.775) ; v2(40.721,59.393) 42.467,61.14 R10.1@42.467,61.373 42.467,59.433 43.284,58.616 R73.2@43.284,58.225 ; C67.1@40.825,22.625 40.816,22.616 C67.1@40.775,22.575 40.822,22.575 40.047,21.8 38.025,21.8 37.6,21.375 37.6,20.425 39.552,18.473 39.552,14.052 38.8,13.3 38.512,13.3 ; C67.1@41.1,22.55 47.15,22.55 C66.1@47.25,22.65 C60.1@52.125,22.65 ; R95.1@43.675,17.075 43.675,15.25 C29.1@43.475,15.05 43.475,12.224 C28.1@44.191,12.224 ; 45.394,13.969 45.394,21.854 ; 45.4,22.55 45.4,13.975 44.191,12.766 C28.1@44.191,12.224 ; R11.1@45.951,61.373 45.951,60.774 46.207,60.518 49.53,60.518 50.075,59.972 50.075,57.475 48.95,56.35 48.2,56.35 C34.1@52.3,56.35 ; R94.1@46.275,58.225 46.325,58.225 C48.1@48.025,56.525 ; U3.2@47.8,10.625 46.975,10.625 45.376,12.224 C28.1@44.191,12.224 ; v2(51,46.802) 51.827,46.802 52.825,47.8 52.825,48.95 52.316,49.459 ; C60.1@52.3,22.475 53.175,21.6 56.8,21.6 C37.1@57.675,22.475 62.55,22.475 67.476,27.401 C35.1@67.476,29.449 ; v2(53.395,56.4) C34.1@52.3,56.4 58.6,56.4 C61.1@58.775,56.225 62.525,56.225 67.5,51.25 C57.1@67.5,47.4 69.2,45.7 69.2,42.275 68.825,41.9 67.725,41.9 67.375,41.55 C53.1@67.375,40.95 67.375,35.625 C36.1@67.525,35.475 ; R3.2@54.659,61.373 55.536,62.25 58.025,62.25 58.45,62.675 58.45,64.025 57.919,64.556 v2(56.926,64.556) ; C35.1@67.5,29.425 67.7,29.625 C36.1@67.7,35.65 ; v1(80.675,40.198) B2.1@80.676,42.358 B2.4@84.486,42.358 87.01,44.883 R29.1@87.01,54.95 ; R28.1@84.875,54.95 R29.1@87.01,54.95 ; 88.85,59.05 88.85,58.261 90.175,56.936 90.175,54.95 ; R33.2@95.55,54.95 94.467,54.95 R32.1@93.415,54.95 R31.1@91.28,54.95 R30.1@89.145,54.95 R29.1@87.01,54.95 ; 37.28,13.299 38.511,13.299 38.512,13.3 ; 37.28,13.299 37.281,13.3 R24.2@37.975,13.3 38.512,13.3
  Bottom Layer w0.305: P10.4@14.365,11.24 16.375,13.25 36.235,13.25 v2(36.733,12.752) ; v1(23.576,59.222) v2(35.1,59.222) 35.702,59.824 40.29,59.824 v2(40.721,59.393) ; C146.1@39.025,31.7 39.8,31.7 v2(40.725,30.775) ; 49.404,34.275 49.404,36.129 50.171,36.896 52.679,36.896 53.404,36.171 53.404,34.275 53.404,33.441 53.81,33.035 57.797,33.035 58.204,33.441 ; v2(51,46.802) C151.1@51,47.7 ; 51.004,45.575 51.004,44.321 51.425,43.9 51.425,42.925 51.825,42.525 55.794,42.525 56.464,43.195 56.464,43.961 55.804,44.621 55.804,45.575 ; v2(53.395,56.4) 53.395,58.17 56.926,61.701 v2(56.926,64.556) ; 58.204,34.275 58.204,33.441 ; 59.804,34.275 59.804,33.965 ; v2(63.632,33.965) 59.804,33.965 ; v2(67.781,33.721) 76.171,33.721 80.675,38.225 v1(80.675,40.198) ; 58.204,33.441 58.204,32.849 58.831,32.222 58.991,32.222 59.804,33.035 59.804,33.965
  Bottom Layer w0.381: 39.004,34.275 39.004,31.721 C146.1@39.025,31.7 ; C144.1@49.4,31.725 49.404,31.729 49.404,34.275 ; C151.1@51,47.7 51.004,47.696 51.004,45.575 ; 53.404,34.275 53.404,31.896 C145.1@53.425,31.875 ; C143.1@55.8,47.625 55.804,47.621 55.804,45.575 ; C152.1@58.125,31.75 58.204,31.829 58.204,34.275 ; 59.804,34.275 59.804,31.846 C149.1@59.9,31.75
+5V: C26.1 C27.1 FH19SC-40S-0.5SH.1 FH19SC-40S-0.5SH.2 JP1.1 R25.2 R26.1 S1.3 S1.4 U3.3 | length 215.6
  Top Layer w0.24: FH19SC-40S-0.5SH.2@58.725,67.025 58.725,67.02 FH19SC-40S-0.5SH.1@59.225,67.02 ; FH19SC-40S-0.5SH.1@59.225,67.025 FH19SC-40S-0.5SH.1@59.225,67.02 ; 75.059,65.875 59.675,65.875 59.225,66.325 FH19SC-40S-0.5SH.1@59.225,67.02
  Top Layer w0.381: 75.059,65.875 76.475,64.459
  Top Layer w0.508: R26.1@12.575,24.5 13.825,24.5 15.626,22.699 15.626,5.299 17.95,2.975 41.225,2.975 43.316,5.066 C27.1@43.316,5.899 43.316,6.771 44.191,7.646 C26.1@44.191,8.524 44.39,8.325 U3.3@47.8,8.325 v3(51.211,8.325) ; 76.475,64.459 76.475,37.175 77.375,36.275 84.714,36.275 86.125,34.864 86.125,31.025 ; 84.05,19.3 R25.2@84.05,20.975 84.05,16.825 S1.4@83.68,16.825 S1.3@86.22,16.825 88.425,19.03 88.425,23.911 86.125,26.211 86.125,31.025 ; JP1.1@96.475,30.875 95.85,31.5 86.6,31.5 86.125,31.025
  Bottom Layer w0.508: v3(51.211,8.325) 66.5,8.325 73.157,14.982 73.157,19.757 84.275,30.875 JP1.1@96.475,30.875
+12VDC: 12VDC.1 Cin.1 U2.1 | length 39
  Top Layer w0.856: U2.1@78.5,23.825 U2.1@78.5,22.976 ; U2.1@78.516,8.511 78.516,22.976 U2.1@78.5,22.976 ; v4(80.801,23.942) 79.465,23.942 U2.1@78.5,22.976
  Top Layer w1.016: U2.1@75.1,8.511 U2.1@78.516,8.511 ; Cin.1@90.6,29.1 90.6,22.2 12VDC.1@90.65,22.15
  Bottom Layer w1.016: v4(80.801,23.942) 88.858,23.942 12VDC.1@90.65,22.15
A0: "SDRAM 256Mbit.23" LCD_TFT.20 U1.16 | length 57.3
  Top Layer w0.203: LCD_TFT.20@9.865,40.54 v1(11.675,42.35) ; v1(26.09,38.115) 28.757,35.448 v1@29.825,35.448 ; v1(32.796,34.127) v1(32.796,35.143) ; v1(34.066,42.306) 34.21,42.449 U1.16@37.016,42.449 40.145,42.449 40.619,41.976 40.619,38.756 v1(40.85,38.525)
  Bottom Layer w0.203: v1@11.839,42.186 15.91,38.115 v1(26.09,38.115) ; v1(29.825,35.475) 32.464,35.475 v1(32.796,35.143) ; v1(32.796,34.127) 34.277,34.127 35.8,35.65 35.8,37.425 35.28,37.945 33.255,37.945 32.644,38.556 32.644,42.019 32.931,42.306 v1(34.066,42.306) ; v1(40.85,38.525) 41.975,38.525 42.204,38.296 42.204,34.275
A1: "SDRAM 256Mbit.24" U1.17 | length 11.6
  Top Layer w0.203: U1.17@37.016,41.949 39.705,41.949 40.208,41.446 40.208,39.08 40.011,38.882 40.011,37.839 40.25,37.6 v1(40.925,37.6)
  Bottom Layer w0.203: v1(40.925,37.6) 41.404,37.121 41.404,34.275
A2: "SDRAM 256Mbit.25" U1.18 | length 17.1
  Top Layer w0.203: 33.18,40.025 v1(33.925,40.025) ; 33.18,40.045 33.05,40.175 33.05,41.2 33.305,41.455 37.01,41.455 U1.18@37.016,41.449
  Bottom Layer w0.203: v1(33.925,40.025) 33.93,40.025 34.505,40.599 34.505,40.605 34.55,40.65 35.666,40.65 38.066,38.25 39.2,38.25 40.604,36.846 40.604,34.275
A3: "SDRAM 256Mbit.26" U1.19 | length 10.3
  Top Layer w0.203: U1.19@37.016,40.949 38.299,40.949 38.868,41.518 39.502,41.518 39.802,41.218 39.802,39.302 39.603,39.103 39.603,36.572 v1(39.8,36.375)
  Bottom Layer w0.203: v1(39.8,36.375) 39.804,36.371 39.804,34.275
A4: "SDRAM 256Mbit.29" U1.20 | length 16.2
  Top Layer w0.203: v1(33.9,40.85) 35.35,40.85 35.751,40.449 U1.20@37.016,40.449
  Bottom Layer w0.203: v1(33.9,40.85) 34.06,40.85 34.41,41.2 36.756,41.2 38.186,39.771 40.046,39.771 40.208,39.933 40.208,42.202 39.804,42.606 39.804,45.575
A5: "SDRAM 256Mbit.30" U1.21 | length 10.5
  Top Layer w0.203: U1.21@37.016,39.949 38.023,39.949 38.435,39.537 v1(38.435,39.075)
  Bottom Layer w0.203: v1(38.435,39.075) 40.152,39.075 40.614,39.537 40.614,42.774 40.604,42.785 40.604,45.575
A6: "SDRAM 256Mbit.31" U1.60 | length 22.7
  Top Layer w0.203: v1(41.462,43.474) 41.462,39.763 42.238,38.987 v1(42.238,32.864) ; v1(45.801,31.282) 46.316,30.767 U1.60@46.316,26.649
  Bottom Layer w0.203: 41.404,45.575 41.404,43.533 v1(41.462,43.474) ; v1(42.238,32.864) 42.238,31.912 42.868,31.282 v1(45.801,31.282)
A7: "SDRAM 256Mbit.32" U1.63 | length 23.2
  Top Layer w0.203: v1(46.487,41.417) 46.487,31.925 47.816,30.596 U1.63@47.816,26.649
  Bottom Layer w0.203: 42.204,45.575 42.204,42.421 42.444,42.181 44.219,42.181 44.983,41.417 v1(46.487,41.417)
A8: "SDRAM 256Mbit.33" U1.64 | length 25.8
  Top Layer w0.203: v1(42.854,29.352) 42.854,39.179 43.383,39.708 v1@43.383,42.9 ; v1(48.315,25.161) U1.64@48.316,26.649
  Bottom Layer w0.203: v1(42.854,29.352) 42.854,28.509 44.563,26.8 46.676,26.8 v1(48.315,25.161) ; 43.004,45.575 43.004,44.544 43.35,44.198 v1(43.35,42.9)